# Altium PCB Quad FC V10.1.PcbDoc
Units mil, origin at the board's own origin, x right, y up, seen from the top; angles counter-clockwise.
Board outline 1968.5 x 1968.5 mil, 2 copper layers (Top Layer, Bottom Layer); 70 components, 50 nets, 311 pads, 42 vias.
Unrouted connection lines stored in the file: 2.
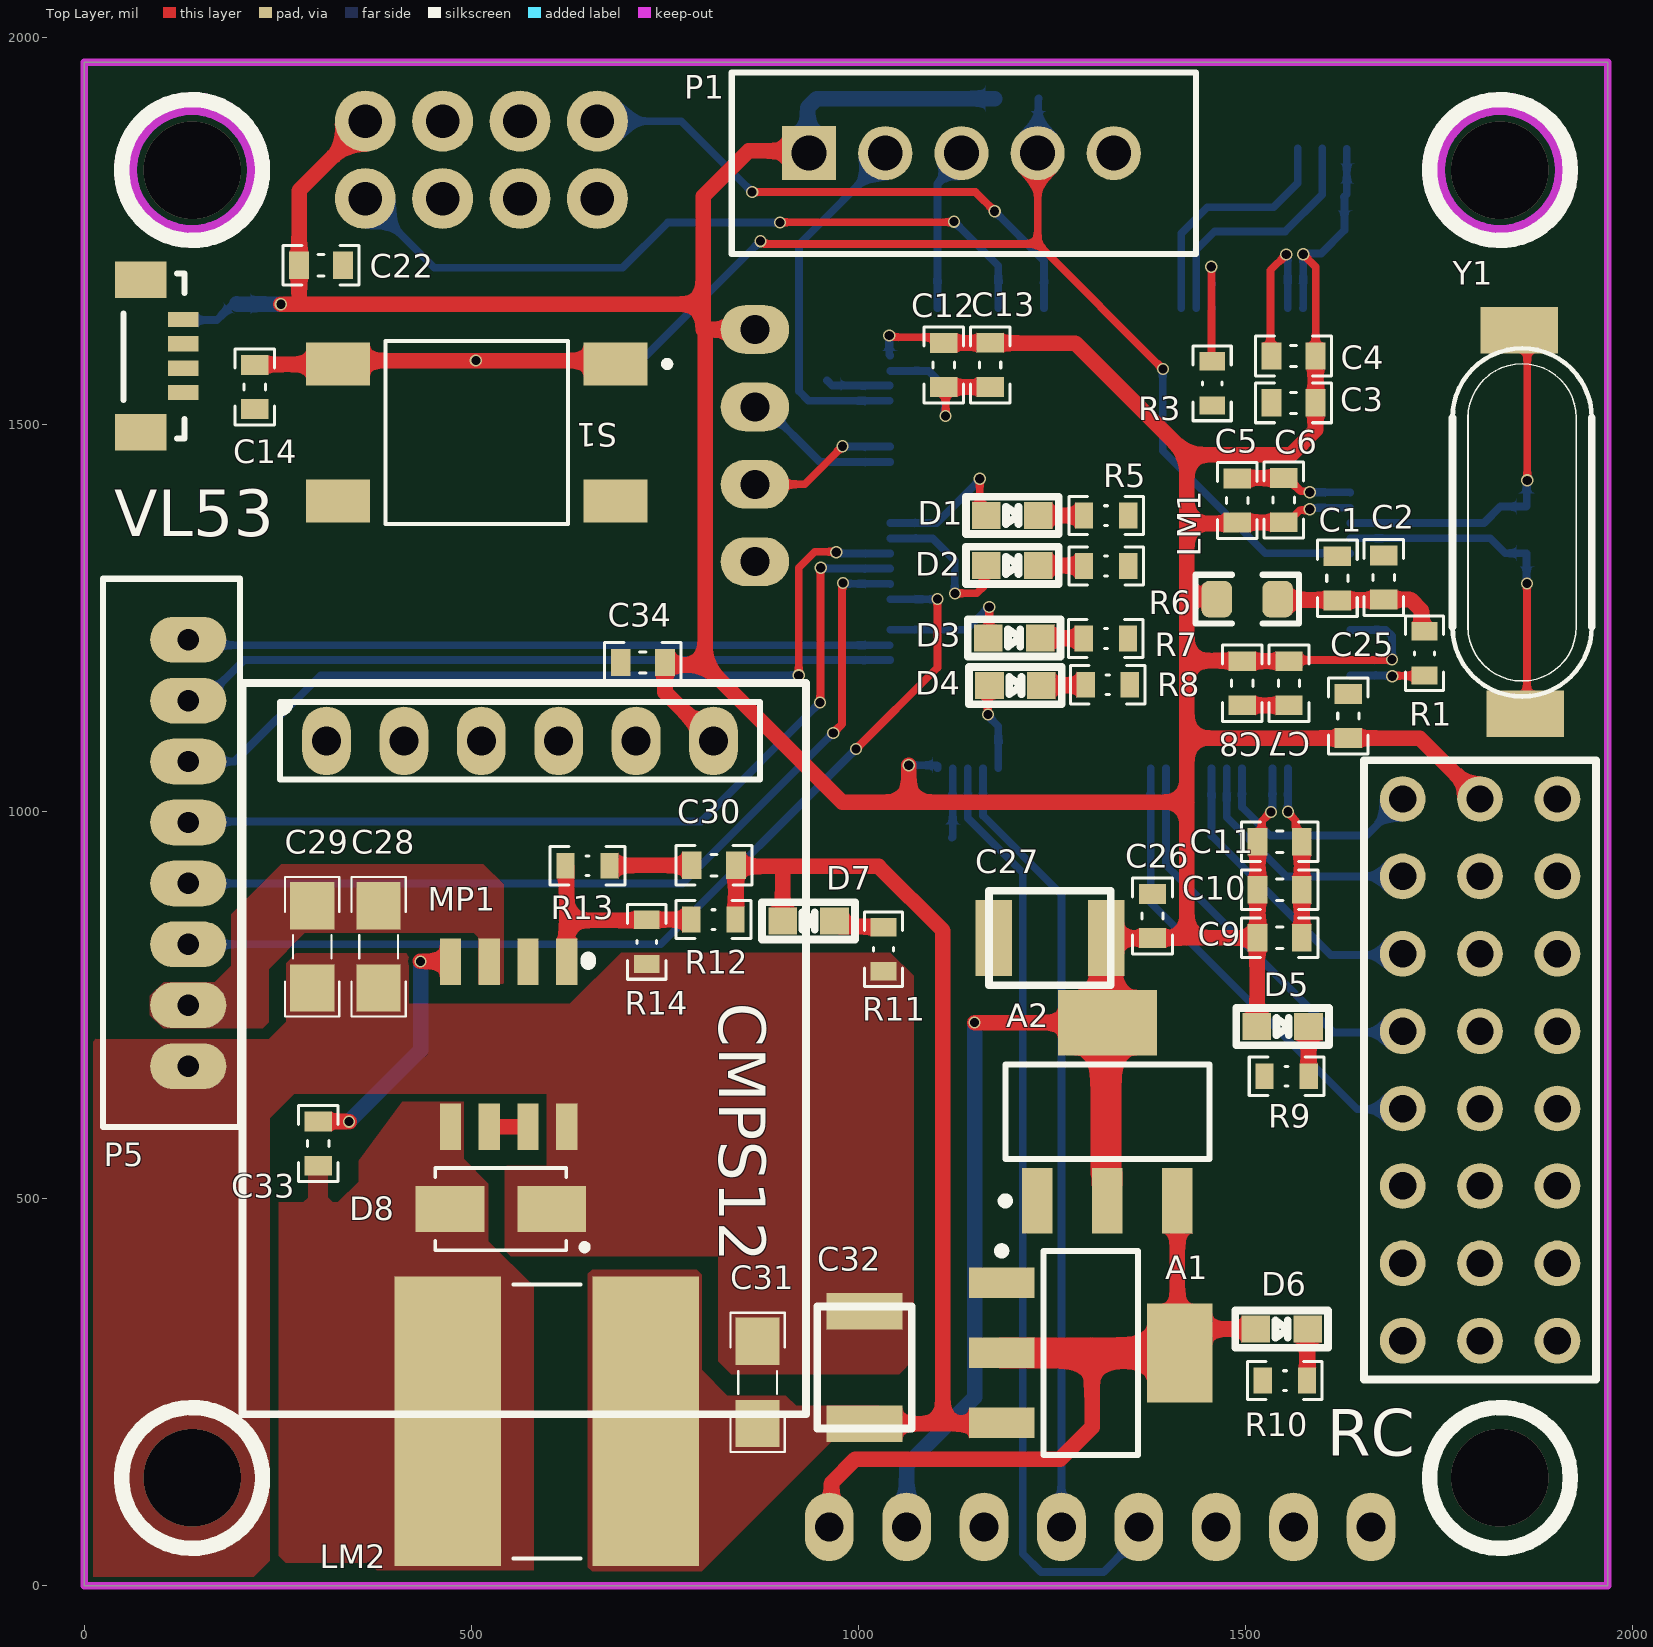
[diagram p0: Top Layer view]
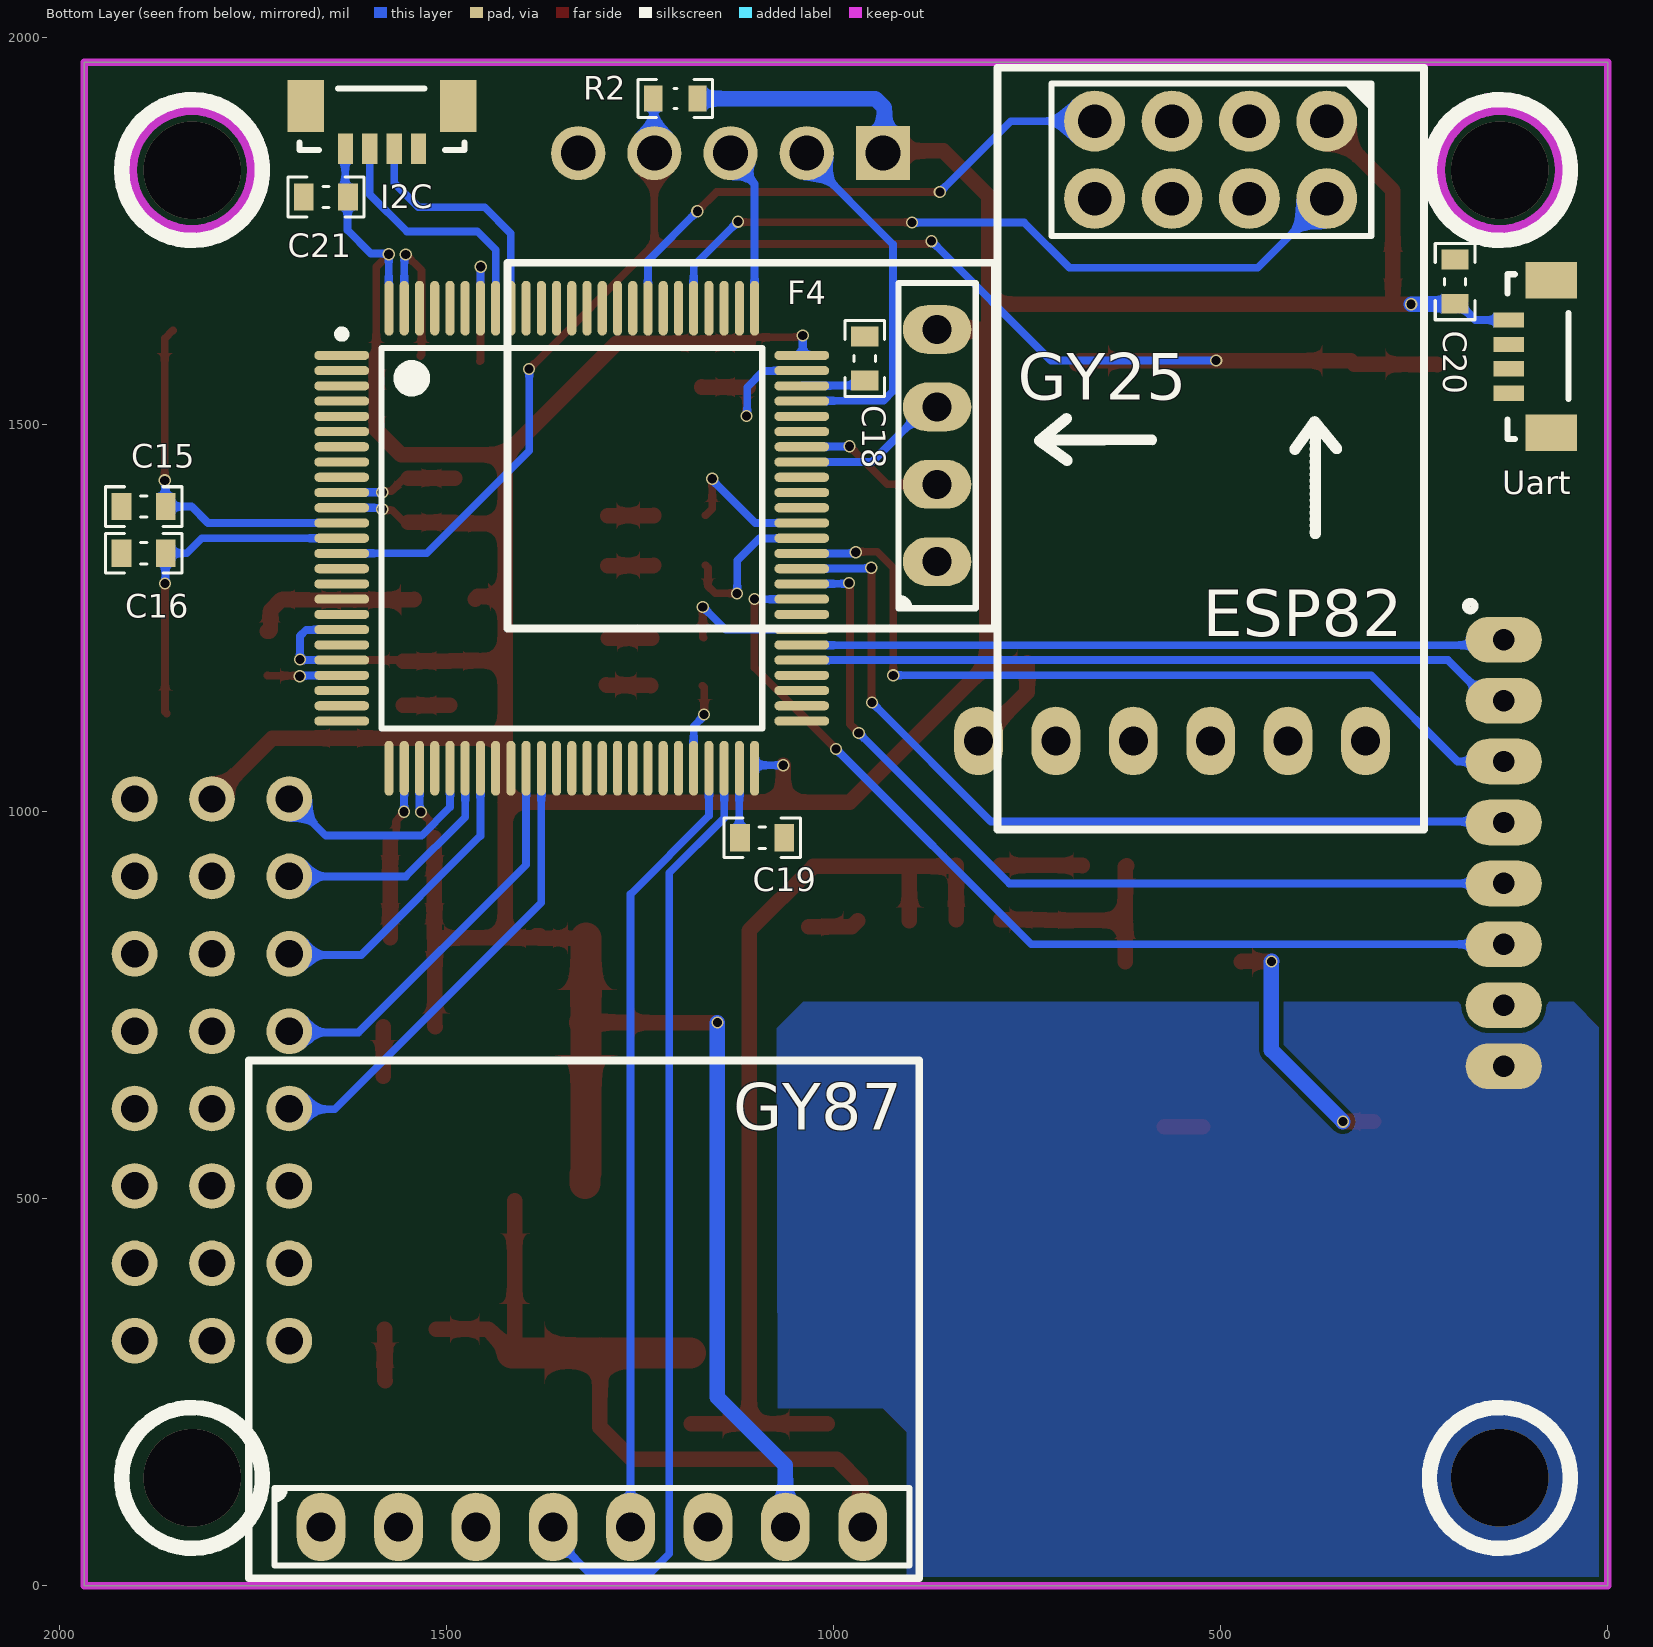
[diagram p1: Bottom Layer view, seen from below]
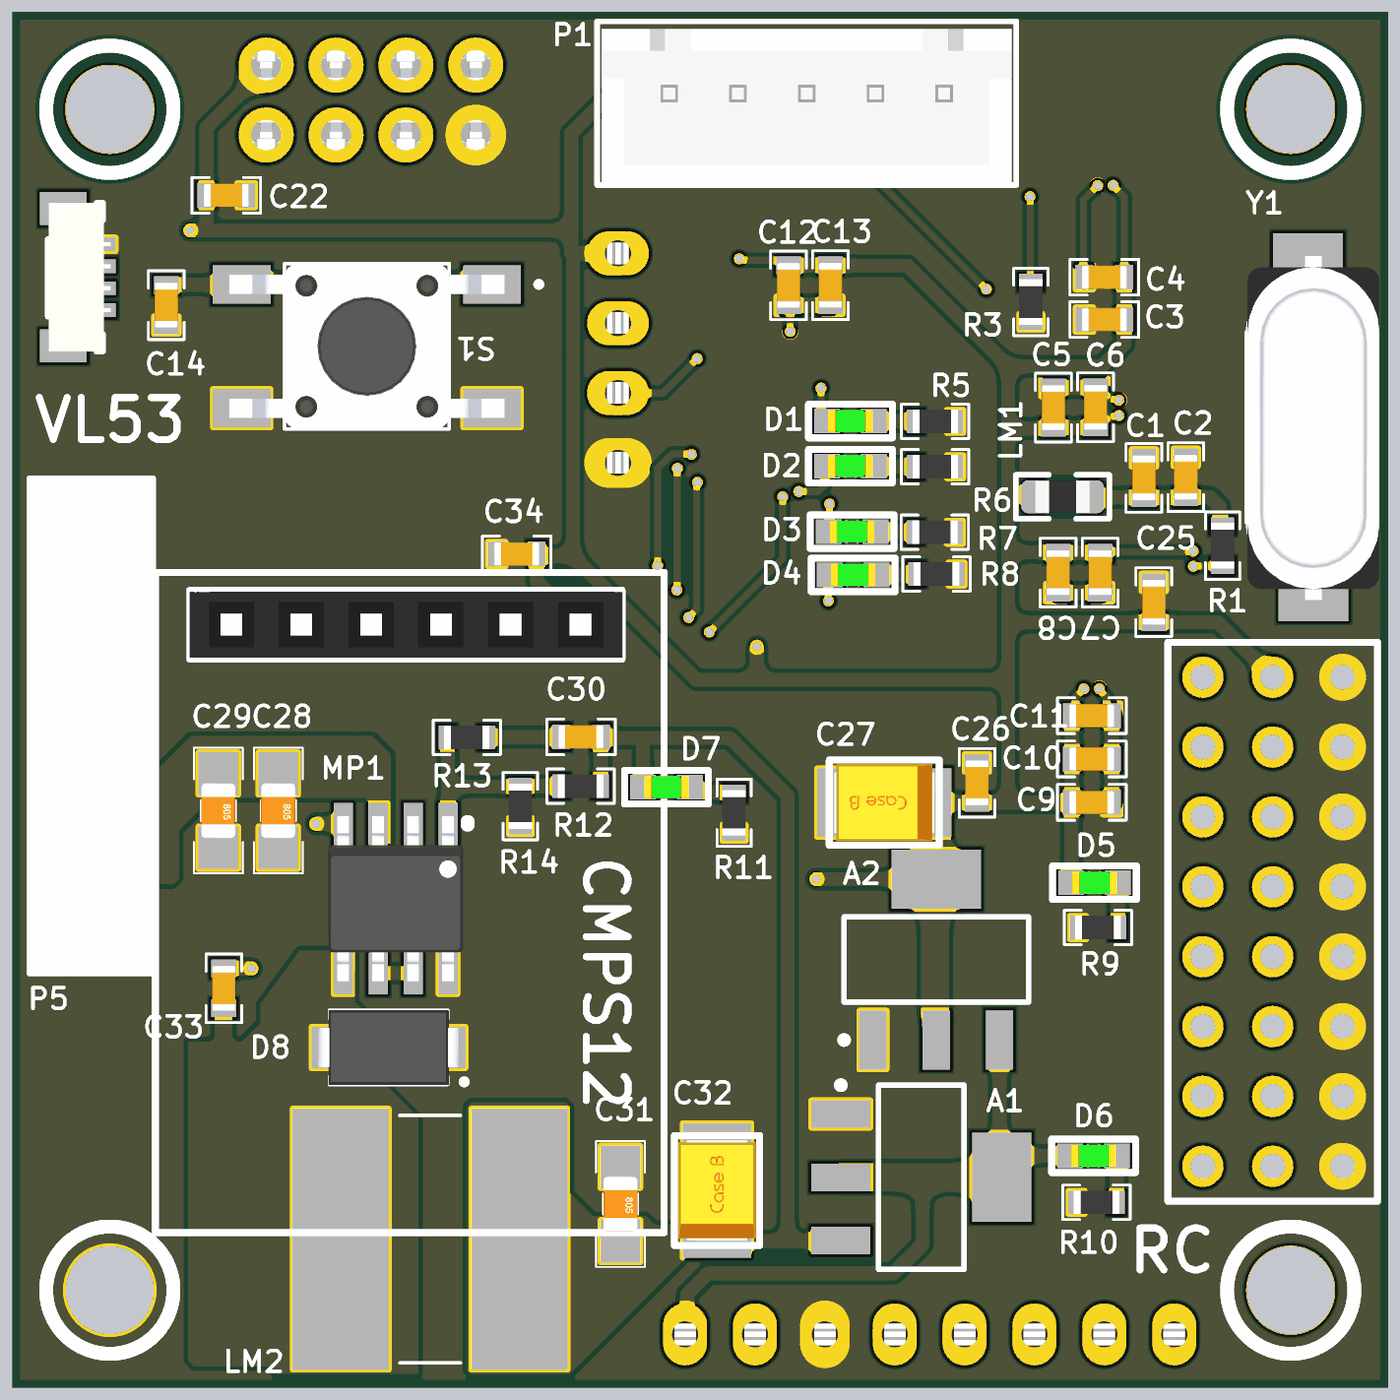
[diagram p2: 3D render of the assembled board from above, using the file's embedded part models]
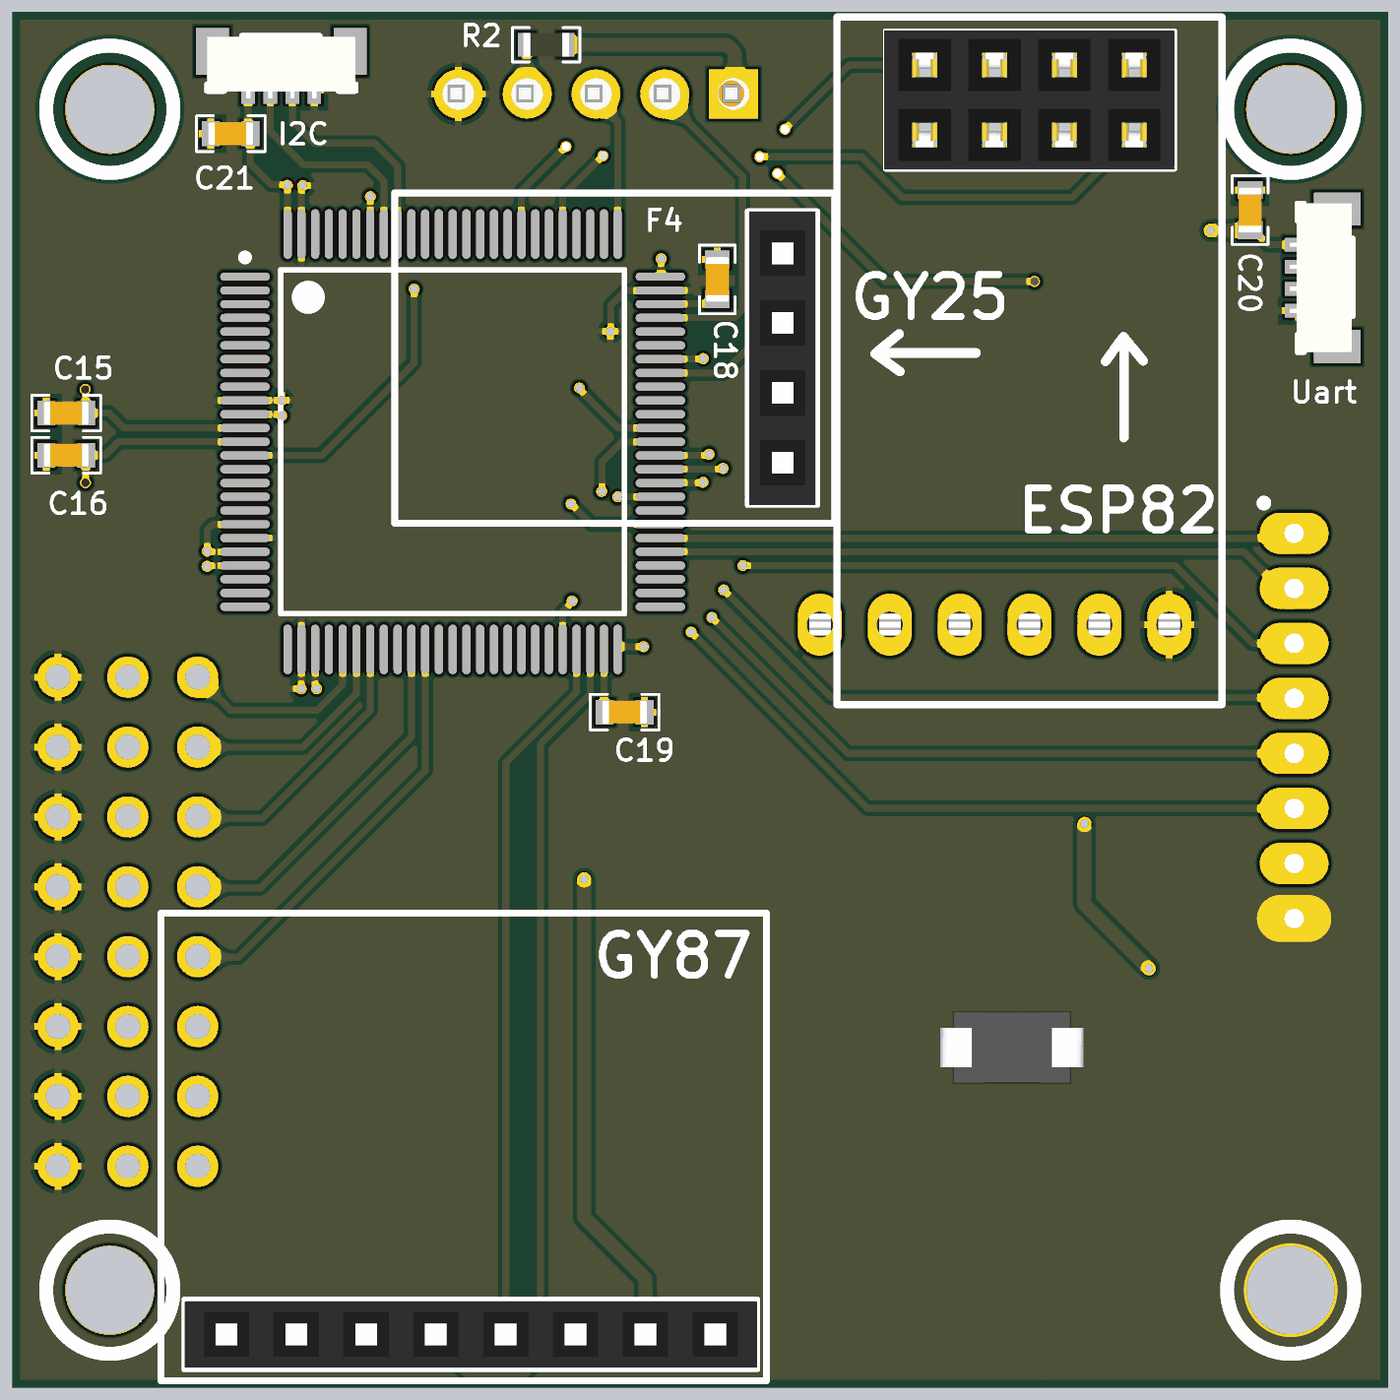
[diagram p3: 3D render of the assembled board from below, using the file's embedded part models]

## Layer stack, top to bottom
Top Solder: solder mask 0.4, Solder Resist, Dk 3.5
Top Layer: signal copper 1.4
Dielectric 1: dielectric 12.6, FR-4, Dk 4.8
Bottom Layer: signal copper 1.4
Bottom Solder: solder mask 0.4, Solder Resist, Dk 3.5

## Board outline
0,0 1968.5,0 1968.5,1968.5 0,1968.5

## Design rules (kind name [scope] priority, off if disabled: settings)
Clearance [All] p1: gap=6 ignorepadtopadclearanceinfootprint=FALSE except(0: Arc-Hole Track-Hole SMDPad-Hole THPad-Hole Via-Hole Fill-Hole Poly-Hole Region-Hole Text-Hole)
HoleSize [All] p1: absolutevalues=TRUE maxlimit=393.7 minlimit=1 maxpercent=80.000 minpercent=20.000
PlaneConnect PlaneConnect_2 [All] p1: planeconnectstyle=Direct reliefexpansion=20 reliefentries=4 reliefconductorwidth=10 reliefairgap=10
PlaneConnect PlaneConnect_1 [All] p2: planeconnectstyle=Relief reliefexpansion=20 reliefentries=4 reliefconductorwidth=10 reliefairgap=10
PlaneConnect [All] p3: planeconnectstyle=Relief reliefexpansion=20 reliefentries=4 reliefconductorwidth=10 reliefairgap=10
PolygonConnect PolygonConnect_20 [All vs IsNamedPolygon('NONET_L01_P003')] p1: connectstyle=Direct reliefconductorwidth=10 reliefentries=4 polygonreliefangle="90 Angle" airgapwidth=10
PolygonConnect PolygonConnect_19 [All vs IsNamedPolygon('NONET_L01_P003')] p2: connectstyle=Direct reliefconductorwidth=10 reliefentries=4 polygonreliefangle="90 Angle" airgapwidth=10
PolygonConnect PolygonConnect_18 [All vs IsNamedPolygon('NONET_L01_P002')] p3: connectstyle=Direct reliefconductorwidth=10 reliefentries=4 polygonreliefangle="90 Angle" airgapwidth=10
PolygonConnect PolygonConnect_17 [All vs IsNamedPolygon('NONET_L01_P001')] p4: connectstyle=Direct reliefconductorwidth=10 reliefentries=4 polygonreliefangle="90 Angle" airgapwidth=10
PolygonConnect PolygonConnect_16 [All vs IsNamedPolygon('NETC37_1_L01_P000')] p5: connectstyle=Direct reliefconductorwidth=10 reliefentries=4 polygonreliefangle="90 Angle" airgapwidth=10
PolygonConnect PolygonConnect_15 [All vs IsNamedPolygon('GND_L02_P008')] p6: connectstyle=Direct reliefconductorwidth=10 reliefentries=4 polygonreliefangle="90 Angle" airgapwidth=10
PolygonConnect PolygonConnect_14 [All vs IsNamedPolygon('GND_L01_P007')] p7: connectstyle=Direct reliefconductorwidth=10 reliefentries=4 polygonreliefangle="90 Angle" airgapwidth=10
PolygonConnect PolygonConnect_13 [All vs IsNamedPolygon('GND_L02_P001') Or IsNamedPolygon('NONET_L02_P004')] p8: connectstyle=Direct reliefconductorwidth=10 reliefentries=4 polygonreliefangle="90 Angle" airgapwidth=10
PolygonConnect PolygonConnect_12 [All vs IsNamedPolygon('GND_L01_P006')] p9: connectstyle=Direct reliefconductorwidth=10 reliefentries=4 polygonreliefangle="90 Angle" airgapwidth=10
PolygonConnect PolygonConnect_11 [All vs IsNamedPolygon('NONET_L01_P005')] p10: connectstyle=Direct reliefconductorwidth=10 reliefentries=4 polygonreliefangle="90 Angle" airgapwidth=10
PolygonConnect PolygonConnect_10 [All vs IsNamedPolygon('NETC37_1_L01_P002')] p11: connectstyle=Direct reliefconductorwidth=10 reliefentries=4 polygonreliefangle="90 Angle" airgapwidth=10
PolygonConnect PolygonConnect_9 [All vs IsNamedPolygon('MP1584-FB_L01_P005')] p12: connectstyle=Direct reliefconductorwidth=10 reliefentries=4 polygonreliefangle="90 Angle" airgapwidth=10
PolygonConnect PolygonConnect_8 [All vs IsNamedPolygon('GND_L02_P001')] p13: connectstyle=Direct reliefconductorwidth=10 reliefentries=4 polygonreliefangle="90 Angle" airgapwidth=10
PolygonConnect PolygonConnect_7 [All vs IsNamedPolygon('MP1584-FB_L01_P005')] p14: connectstyle=Direct reliefconductorwidth=10 reliefentries=4 polygonreliefangle="90 Angle" airgapwidth=10
PolygonConnect PolygonConnect_6 [All vs IsNamedPolygon('MP1584-FB_L01_P005')] p15: connectstyle=Direct reliefconductorwidth=10 reliefentries=4 polygonreliefangle="90 Angle" airgapwidth=10
PolygonConnect PolygonConnect_5 [All vs IsNamedPolygon('NONET_L02_P004')] p16: connectstyle=Direct reliefconductorwidth=10 reliefentries=4 polygonreliefangle="90 Angle" airgapwidth=10
PolygonConnect PolygonConnect_4 [All vs IsNamedPolygon('NETC34_1_L01_P003')] p17: connectstyle=Direct reliefconductorwidth=10 reliefentries=4 polygonreliefangle="90 Angle" airgapwidth=10
PolygonConnect PolygonConnect_3 [All vs IsNamedPolygon('NETC34_2_L01_P002')] p18: connectstyle=Direct reliefconductorwidth=10 reliefentries=4 polygonreliefangle="90 Angle" airgapwidth=10
PolygonConnect PolygonConnect_2 [All vs IsNamedPolygon('GND_L02_P001')] p19: connectstyle=Direct reliefconductorwidth=10 reliefentries=4 polygonreliefangle="90 Angle" airgapwidth=10
PolygonConnect PolygonConnect_1 [All vs IsNamedPolygon('VBAT+_L01_P000')] p20: connectstyle=Direct reliefconductorwidth=10 reliefentries=4 polygonreliefangle="90 Angle" airgapwidth=10
PolygonConnect [All] p21: connectstyle=Relief reliefconductorwidth=10 reliefentries=4 polygonreliefangle="90 Angle" airgapwidth=10
RoutingVias [All] p1: holewidth=11.81 width=15.75 viastyle="Through Hole" minholewidth=10 minwidth=10 maxholewidth=196.85 maxwidth=196.85
SilkToSilkClearance [All] p1: silktosilkclearance=6
SolderMaskExpansion [All] p1: expansion=4 istentingtop=FALSE
Width [All] p1: maxlimit=60 minlimit=6 preferedwidth=20
27 further rules are at their usual default settings.

## Classes and differential pairs
component class "Quad FC power V10.1": A1 A2 C26 C27 C28 C29 C30 C31 C32 C33 D5 D6 D7 D8 LM2 MP1 P5 R9 R10 R11 R12 R13 R14
component class "Quad FC V10.1": C1 C2 C3 C4 C5 C6 C7 C8 C9 C10 C11 C12 C13 C14 C15 C16 C18 C19 C20 C21 C22 C25 C34 CMPS12 D1 D2 D3 D4 ESP82 F4 GY25 GY87 I2C LM1 P1 R1 R2 R3 R5 R6 R7 R8 RC S1 Uart VL53 Y1

## Components (designator, comment, footprint, x,y, rotation, side; value= is the part's Value field where it differs from the comment)
A1 "3v3 regulator" SOT230P700X180-4N 1300.59,300.79 r0 top
A2 "5V regulator" SOT230P700X180-4N 1322.05,612.4 r90 top
C1 "100nF" CAP0603 1619.29,1301.77 r270 top
C2 "1uF" CAP0603 1679.13,1302.76 r270 top
C3 "100nF" CAP0603 1562.6,1528.35 r0 top
C4 "100nF" CAP0603 1562.6,1588.98 r0 top
C5 "100nF" CAP0603 1489.76,1402.36 r270 top
C6 "100nF" CAP0603 1550,1402.76 r270 top
C7 "100nF" CAP0603 1556.69,1166.14 r270 top
C8 "1uF" CAP0603 1496.46,1166.14 r270 top
C9 "100nF" CAP0603 1544.68,837.4 r180 top
C10 "4.7uF" CAP0603 1544.68,899.41 r180 top
C11 "100nF" CAP0603 1544.68,961.42 r180 top
C12 "100nF" CAP0603 1110.63,1577.36 r90 top
C13 "100nF" CAP0603 1170.47,1577.56 r90 top
C14 "100nF" CAP0603 220.08,1549.02 r270 top
C15 "10pF" CAP0603 1891.73,1394.49 r180 bottom
C16 "10pF" CAP0603 1891.73,1334.25 r0 bottom
C18 "2.2uF" CAP0603 959.84,1585.83 r90 bottom
C19 "2.2uF" CAP0603 1092.52,966.54 r180 bottom
C20 "100nF" CAP0603 197.24,1685.04 r90 bottom
C21 "100nF" CAP0603 1656.3,1794.49 r0 bottom
C22 "100nF" CAP0603 305.91,1706.3 r0 top
C25 "100nF" CAP0603 1633.47,1123.82 r90 top
C26 "100nF" CAP0603 1380.32,865.35 r270 top
C27 "10uF" MY_CAP_SMD-B 1247.64,837.01 r180 top value=3300u
C28 "2.2uF" CAPC3413X12N 380.32,825.59 r270 top
C29 "2.2uF" CAPC3413X12N 294.49,825.59 r270 top
C30 "100nF" CAP0603 813.58,931.1 r0 top
C31 "10uF" CAPC3413X12N 870.08,262.6 r270 top
C32 "100uF" MY_CAP_SMD-B 1008.27,281.89 r90 top value=3300u
C33 "100nF" CAP0603 302.36,571.26 r90 top
C34 "100nF" CAP0603 721.65,1192.91 r180 top
CMPS12 "CMPS12" "SAMTEC SSW-106-03-T-S" 562.99,1091.73 r0 top
D1 "LED" "0603 - LED" 1199.21,1383.07 r0 top
D2 "LED" "0603 - LED" 1199.21,1318.5 r0 top
D3 "LED" "0603 - LED" 1201.58,1224.8 r0 top
D4 "LED" "0603 - LED" 1203.12,1162.99 r0 top
D5 "LED" "0603 - LED" 1548.46,722.44 r0 top
D6 "LED" "0603 - LED" 1547.24,331.5 r0 top
D7 "LED" "0603 - LED" 935.83,859.06 r0 top
D8 "SS34" DIOM4226X244N 538.19,486.61 r180 top
ESP82 "ESP82" "HARWIN M20-7830445" 512.99,1842.52 r270 bottom
F4 "STM32F407VGT6" STM-LQFP100_N 1338.58,1353.54 r180 bottom locked
GY25 "GY25" "SAMTEC SSW-104-03-T-S" 866.54,1473.23 r90 bottom
GY87 "GY87" "SAMTEC SSW-108-03-T-S" 1312.6,75.98 r180 bottom
I2C "I2C" "JST BM04B-SURS-TF" 1583.86,1884.65 r180 bottom
LM1 "10uH" 0805L 1502.76,1274.8 r180 top value=FB805
LM2 "47uH" IND_RLS-105 597.64,212.2 r0 top
MP1 "MP9486AGN-Z" SOIC127P600X170-9N 548.23,699.53 r270 top
P1 "Programming connector" Connector1X5 936.61,1851.18 r0 top locked
P5 "Connector 8" "JST B8B-PH-K" 134.25,946.85 r270 top
R1 "0" RES0603 1731.89,1204.72 r270 top
R2 "1K" RES0603 1204.73,1921.65 r0 bottom
R3 "1K" RES0603 1457.48,1553.54 r270 top
R5 "1K" RES0603 1320.47,1382.68 r0 top
R6 "1K" RES0603 1320.47,1317.72 r0 top
R7 "1K" RES0603 1320.08,1224.02 r0 top
R8 "1K" RES0603 1322.44,1164.17 r0 top
R9 "1K" RES0603 1553.54,658.27 r180 top
R10 "1K" RES0603 1551.38,264.96 r180 top
R11 "1K" RES0603 1032.68,822.44 r270 top
R12 "590k" RES0603 812.99,860.63 r0 top value=1K
R13 "10k" RES0603 650.2,930.31 r180 top value=1K
R14 "10k" RES0603 726.77,831.89 r90 top value=1K
RC "Radio Control" HEADER8X3 1703.54,1016.53 r270 top
S1 "" SW_TL3301FF160QG 507.09,1490.16 r180 top
Uart "Uart" "JST BM04B-SURS-TF" 100.39,1588.19 r270 bottom
VL53 "VL53" "JST BM04B-SURS-TF" 100.39,1588.98 r90 top
Y1 "CRYSTAL_SMD" "My_Crystal - SMD" 1858,1374.02 r90 top locked

## Footprints (in the part's own frame and the unit in brackets; to place one, negate y for a bottom-side part, rotate by r counter-clockwise, add the part's x,y. Pads: shape width x height; smd on the part's side, far side on the other; paste and mask are expansions set on the pad)
"0603 - LED" [mil]
  rect 37x35 smd: 1(-33.5,0) 2(33.5,0)
  silkscreen extent -60,-24 60,24, body extent -32,-16 32,16, height 43
0805L [mm] ",0805, 2012, 200X130"
  rrect50% 1x1.2 smd mask+0.075: 1(-1,0) 2(1,0)
  Top Layer pour cut-out: -0.5,0.8 0.5,0.8 0.5,-0.8 -0.5,-0.8
  silkscreen extent -1.7,-0.8 1.7,0.8, body extent -1,-0.6 1,0.6, height 0.95
CAP0603 [mm] "Chip Capacitor, 2-Leads, Body 1/60x0/80mm, IPC Medium Density DESIGNER:ABBAS BASEREH"
  rect 0.65x0.9 smd: 1(-0.725,0) 2(0.725,0)
  silkscreen extent -1.25,-0.65 1.25,0.65, body extent -0.82,-0.43 0.82,0.43, height 0.4
CAPC3413X12N [mm] "Chip Capacitor, 2-Leads, Body 3/40x1/30mm, IPC Medium Density-Design:Abbas Basereh"
  rect 1.55x1.45 smd: 1(-1.35,0) 2(1.35,0)
  silkscreen extent -2.29,-0.89 2.29,0.89, body extent -1,-0.62 1,0.63, height 0.78
Connector1X5 [mil] "Connector; Header; 5 Position"
  rect 70x70 hole 45: 1(0,0)
  round 70 hole 45: 2(98.43,0) 3(196.85,0) 4(295.28,0) 5(393.7,0)
  silkscreen extent -100,-130 500,104, body extent -93,-133 493,93, height 276
DIOM4226X244N [mm]
  rect 2.26x1.51 smd: 1(-1.67,0) 2(1.67,0)
  silkscreen extent -2.85,-1.35 2.15,1.35, body extent -2.6,-1.36 2.6,1.36, height 1.19
"HARWIN M20-7830445" [mm] "2.54mm DIL PC TAIL PIN HEADER ASSEMBLY"
  round 2 hole 1.1: 1(-1.27,3.81) 2(-1.27,1.27) 3(-1.27,-1.27) 4(-1.27,-3.81) 5(1.27,-3.81) 6(1.27,-1.27) 7(1.27,1.27) 8(1.27,3.81)
  silkscreen extent -2.5,-5.23 2.5,5.27, body extent -2.52,-5.28 2.52,5.28, height 8.5
HEADER8X3 [mm]
  round 1.5 hole 0.9: 1(0,0) 2(2.54,0) 3(5.08,0) 4(7.62,0) 5(10.16,0) 6(12.7,0) 7(15.24,0) 8(17.78,0) 9(0,2.54) 10(2.54,2.54) 11(5.08,2.54) 12(7.62,2.54) 13(10.16,2.54) 14(12.7,2.54) 15(15.24,2.54) 16(17.78,2.54) 17(0,5.08) 18(2.54,5.08) 19(5.08,5.08) 20(7.62,5.08) 21(10.16,5.08) 22(12.7,5.08) 23(15.24,5.08) 24(17.78,5.08)
  silkscreen extent -1.27,-1.27 19.05,6.35
IND_RLS-105 [mm]
  rect 3.5x9.5 smd: 1(-3.25,0) 2(3.25,0)
  silkscreen extent -1.1,-4.5 1.1,4.5
"JST B8B-PH-K" [mm]
  oval 1.5x2.5 hole 0.7: 1(-7,0) 2(-5,0) 3(-3,0) 4(-1,0) 5(1,0) 6(3,0) 7(5,0) 8(7,0)
  silkscreen extent -9,-2.8 9,1.7, body extent -8.95,-2.8 8.95,1.7, height 6
"JST BM04B-SURS-TF" [mm] "1.0mm pitch/Disconnectable Crimp style connector"
  rect 0.5x1 smd: 1(-1.2,-0.7) 2(-0.4,-0.7) 3(0.4,-0.7) 4(1.2,-0.7)
  rect 1.2x1.7 smd: M(-2.5,0.7) M(2.5,0.7)
  silkscreen extent -2.7,-0.74 2.71,1.27, body extent -2.7,-1.02 2.7,1.23, height 2.75
MY_CAP_SMD-B [mm] "3.1X4"
  rect 1.2x2.5 smd: +(-1.845,0) -(1.845,0)
  silkscreen extent -2,-1.55 2,1.55, body extent -1.85,-1.41 1.85,1.41, height 2.14
"My_Crystal - SMD" [mil]
  rect 60x100 smd: 1(-247.06,-3.93) 2(248.03,3.94)
  silkscreen extent -225,-90 225,90, body extent -247,-98 245,91, height 154
RES0603 [mm] "Chip Resistor, 2-Leads, Body 1/60x0/80mm, IPC Medium Density DESIGNER:ABBAS BASEREH"
  rect 0.6x0.85 smd: 1(-0.725,0) 2(0.725,0)
  silkscreen extent -1.23,-0.63 1.23,0.62, body extent -0.82,-0.43 0.82,0.43, height 0.4
"SAMTEC SSW-104-03-T-S" [mm]
  oval 1.6x2.25 hole 0.95: 1(-3.81,0) 2(-1.27,0) 3(1.27,0) 4(3.81,0)
  silkscreen extent -5.34,-1.27 5.34,1.27, body extent -5.33,-1.21 5.33,1.21, height 8.51
"SAMTEC SSW-106-03-T-S" [mm]
  oval 1.6x2.25 hole 0.95: 1(-6.35,0) 2(-3.81,0) 3(-1.27,0) 4(1.27,0) 5(3.81,0) 6(6.35,0)
  silkscreen extent -7.88,-1.27 7.88,1.27, body extent -7.87,-1.21 7.87,1.21, height 8.51
"SAMTEC SSW-108-03-T-S" [mm]
  oval 1.6x2.25 hole 0.95: 1(-8.89,0) 2(-6.35,0) 3(-3.81,0) 4(-1.27,0) 5(1.27,0) 6(3.81,0) 7(6.35,0) 8(8.89,0)
  silkscreen extent -10.42,-1.27 10.42,1.27, body extent -10.41,-1.21 10.41,1.21, height 8.51
SOIC127P600X170-9N [mm]
  rect 1.525x0.7 smd: 1(-2.712,1.905) 2(-2.712,0.635) 3(-2.712,-0.635) 4(-2.712,-1.905) 5(2.712,-1.905) 6(2.712,-0.635) 7(2.712,0.635) 8(2.712,1.905)
  silkscreen extent -2.79,2.62 -2.69,2.62, body extent -3,-2.45 3,2.45, height 1.7
SOT230P700X180-4N [mm] "SOT223, 4-Leads, Body 6.50x7.00mm (avg), Pitch 2.30mm, IPC Medium Density"
  rect 2.15x1 smd: 1(-2.925,2.3) 2(-2.925,0) 3(-2.925,-2.3)
  rect 2.15x3.25 smd: 4(2.925,0)
  silkscreen extent -3.05,-3.35 1.55,3.47, body extent -1.85,-3.35 1.85,3.35, height 1.8
STM-LQFP100_N [mm] "Thin QFP, 100-Leads, Body 14x14mm, Pitch 0.5mm, IPC Medium Density"
  oval 1.8x0.3 smd: 1(-7.55,6) 2(-7.55,5.5) 3(-7.55,5) 4(-7.55,4.5) 5(-7.55,4) 6(-7.55,3.5) 7(-7.55,3) 8(-7.55,2.5) 9(-7.55,2) 10(-7.55,1.5) 11(-7.55,1) 12(-7.55,0.5) 13(-7.55,0) 14(-7.55,-0.5) 15(-7.55,-1) 16(-7.55,-1.5) 17(-7.55,-2) 18(-7.55,-2.5) 19(-7.55,-3) 20(-7.55,-3.5) 21(-7.55,-4) 22(-7.55,-4.5) 23(-7.55,-5) 24(-7.55,-5.5) 25(-7.55,-6) 51(7.55,-6) 52(7.55,-5.5) 53(7.55,-5) 54(7.55,-4.5) 55(7.55,-4) 56(7.55,-3.5) 57(7.55,-3) 58(7.55,-2.5) 59(7.55,-2) 60(7.55,-1.5) 61(7.55,-1) 62(7.55,-0.5) 63(7.55,0) 64(7.55,0.5) 65(7.55,1) 66(7.55,1.5) 67(7.55,2) 68(7.55,2.5) 69(7.55,3) 70(7.55,3.5) 71(7.55,4) 72(7.55,4.5) 73(7.55,5) 74(7.55,5.5) 75(7.55,6)
  oval 0.3x1.8 smd: 26(-6,-7.55) 27(-5.5,-7.55) 28(-5,-7.55) 29(-4.5,-7.55) 30(-4,-7.55) 31(-3.5,-7.55) 32(-3,-7.55) 33(-2.5,-7.55) 34(-2,-7.55) 35(-1.5,-7.55) 36(-1,-7.55) 37(-0.5,-7.55) 38(0,-7.55) 39(0.5,-7.55) 40(1,-7.55) 41(1.5,-7.55) 42(2,-7.55) 43(2.5,-7.55) 44(3,-7.55) 45(3.5,-7.55) 46(4,-7.55) 47(4.5,-7.55) 48(5,-7.55) 49(5.5,-7.55) 50(6,-7.55) 76(6,7.55) 77(5.5,7.55) 78(5,7.55) 79(4.5,7.55) 80(4,7.55) 81(3.5,7.55) 82(3,7.55) 83(2.5,7.55) 84(2,7.55) 85(1.5,7.55) 86(1,7.55) 87(0.5,7.55) 88(0,7.55) 89(-0.5,7.55) 90(-1,7.55) 91(-1.5,7.55) 92(-2,7.55) 93(-2.5,7.55) 94(-3,7.55) 95(-3.5,7.55) 96(-4,7.55) 97(-4.5,7.55) 98(-5,7.55) 99(-5.5,7.55) 100(-6,7.55)
  silkscreen extent -7.68,-6.25 6.25,6.82, body extent -7,-7 7,7, height 1.6
SW_TL3301FF160QG [mm]
  rect 2.1x1.4 smd: 1(-4.55,-2.25) 2(4.55,-2.25) 3(-4.55,2.25) 4(4.55,2.25)
  silkscreen extent -6.35,-3 3,3, body extent -5,-3 5,3, height 7.1

## Part data
A1 A2: library part ams1117
C1 C2 C3 C4 C5 C6 C7 C8 C9 C10 C11 C12 C13 C14 C15 C16 C18 C19 C20 C21 C22 C25 C26 C30 C33 C34: library part "CAP SMD PACKAGE", "F407VET6 Power CAP", Data=2017-3-10, Desc.="CAP SMD TOTAL PACKAGES", Designer="Abbas Basereh"
C27 C32: library part CAP_TANTAL_B, "3.5X2.8MM"
C28 C29 C31: library part "CAP SMD 0805", "CAP 0805", Data=16-12-2016, Desc.="CAP SMD 0805", Designer="Abbas Basereh"
CMPS12: library part SSW-106-03-T-S, "CONN RCPT 6POS 0.1 TIN PCB", Current Rating (Amps)="5.7A per Contact", Insulation Color=Black, Manufacturer="Samtec Inc.", Material Flammability Rating="UL94 V-0", Operating Temperature="-55°C ~ 105°C", Supplier Part Number 1=SAM8865-ND, ComponentLink1Description=Datasheet, ComponentLink1URL=http://suddendocs.samtec.com/prints/ssw-s.pdf, ComponentLink2Description="DigiKey Link", ComponentLink2URL=https://www.digikey.com/en/products/detail/samtec-inc/SSW-106-03-T-S/1790202, Connector Type=Receptacle, Contact Finish - Mating=Tin, Contact Finish - Post=Tin, Contact Length - Post="0.394\" (10.00mm)", Contact Type=Forked, Fastening Type=Push-Pull, Insulation Height="0.335\" (8.51mm)", LastUpdated="6/21/2022 3:09:22 PM", Lifecycle Status=Active, Minimum Order=1, Mounting Type="Through Hole", Number of Positions=6, Number of Positions Loaded=All, Number of Rows=1, Packaging=Bulk, Part Number=SSW-106-03-T-S, Part Status=Active, Pitch - Mating="0.100\" (2.54mm)", Price=0.55, Series=SSW, Style="Board to Board or Cable", Supplier 1=DigiKey, Termination=Solder
D1 D2 D3 D4 D5 D6 D7: "Led", LatestRevisionDate=08-Jul-2005, LatestRevisionNote="Mech Layer 1 removed.", PackageReference=LED-0, Published=8-Jun-2000, Publisher="Altium Limited"
D8: library part "1n5822 SMD", Manufacturer="ON Semiconductor/Fairchild", Data=16-12-2016, Designer="Abbas Basereh", Link=https://www.aliexpress.com/item/Free-shipping-100pcs-1n5822-sma-smd-do-214ac-Schottky-diode-ss34/32337482329.html?spm=2114.01010208.3.1.zLZDsP&ws_ab_test=searchweb0_0,searchweb201602_4_10065_10068_10084_10083_10080_10082_10081_10060_10061_10062_10056_10055_10054_10059_10099_10078_10079_427_10073_10103_10102_10096_10052_10050_10051,searchweb201603_4&btsid=6e50dc92-ac69-45bc-a19e-209af19ce602, Part. No=SS34
ESP82: library part M20-7830442, "CONN RCPT 8POS 0.1 GOLD PCB", Current Rating (Amps)=3A, Insulation Color=Black, Manufacturer="Harwin Inc.", Material Flammability Rating="UL94 V-0", Operating Temperature="-40°C ~ 105°C", Supplier Part Number 1=952-1789-ND, ComponentLink1Description=Datasheet, ComponentLink1URL=https://cdn.harwin.com/pdfs/C001XX_M20_Series_Connectors.pdf, ComponentLink2Description="DigiKey Link", ComponentLink2URL=http://digikey.com/product-detail/en/harwin-inc/M20-7830442/952-1789-ND/3727758, Connector Type=Receptacle, Contact Finish - Mating=Gold, Contact Finish - Post=Tin, Contact Finish Thickness - Mating=Flash, Contact Length - Post="0.118\" (3.00mm)", Contact Type="Female Socket", Fastening Type=Push-Pull, Insulation Height="0.335\" (8.51mm)", LastUpdated="9/21/2022 7:04:26 PM", Lifecycle Status=Active, Mated Stacking Heights="11.04mm, 12.63mm", Minimum Order=1, Mounting Type="Through Hole", Number of Positions=8, Number of Positions Loaded=All, Number of Rows=2, Packaging=Tube, Part Number=M20-7830442, Part Status=Active, Pitch - Mating="0.100\" (2.54mm)", Price=1.36, Row Spacing - Mating="0.100\" (2.54mm)", Series=M20, Style="Board to Board or Cable", Supplier 1=DigiKey, Termination=Solder
F4: "ARM Cortex-M4 32-bit MCU+FPU, 210 DMIPS, 1024 kB Flash, 192 kB Internal RAM, 82 I/Os, 100-pin LQFP, -40 to 85 degC, Tray", I/Os (High Current)=82, Manufacturer=STMicroelectronics, Operating Frequency(F) (Processor speed) (MHz)=168, Supplier Part Number 1=497-11605-ND, Supply Voltage(Vcc) max (V)=3.6, Supply Voltage(Vcc) min (V)=1.8, ComponentLink1Description="Manufacturer URL", ComponentLink1URL=http://www.st.com/web/en/home.html, ComponentLink2Description=Datasheet, ComponentLink2URL=http://www.st.com/st-web-ui/static/active/en/resource/technical/document/datasheet/DM00037051.pdf, ComponentLink3Description="Package Specification", ComponentLink3URL=http://www.st.com/st-web-ui/static/active/en/resource/technical/document/data_brief/DM00071938.pdf, Core="ARM Cortex-M4", D/A Converter=2x12-bit, DatasheetVersion="Rev. 4", FLASH Size (Prog) (kB)=1024, Internal RAM Size (kB)=192, Mounting Technology="Surface Mount", PackageDescription="100-Pin Low Profile Quad Flat Package, 14 x 14 mm Body, 0.5 mm Pitch", PackageReference=LQFP100, PackageVersion="Rev. 1, 06/2013", Packing=Tray, PartNumber=STM32F407VGT6, Supplier 1=Digi-Key, Supplier 2=Farnell, Supplier 3=Newark, Supplier 4=Mouser, Supplier Part Number 2=2064368, Supplier Part Number 3=73T2333, Supplier Part Number 4=511-STM32F407VGT6
GY25: library part SSW-104-03-T-S, "CONN RCPT 4POS 0.1 TIN PCB", Current Rating (Amps)="5.7A per Contact", Insulation Color=Black, Manufacturer="Samtec Inc.", Material Flammability Rating="UL94 V-0", Operating Temperature="-55°C ~ 105°C", Supplier Part Number 1=SSW-104-03-T-S-ND, ComponentLink2Description="DigiKey Link", ComponentLink2URL=http://digikey.com/product-detail/en/samtec-inc/SSW-104-03-T-S/SSW-104-03-T-S-ND/7874034, Connector Type=Receptacle, Contact Finish - Mating=Tin, Contact Finish - Post=Tin, Contact Type=Forked, Fastening Type=Push-Pull, LastUpdated="6/21/2022 3:08:52 PM", Lifecycle Status=Active, Minimum Order=1, Mounting Type="Through Hole", Number of Positions=4, Number of Positions Loaded=All, Number of Rows=1, Packaging=Bulk, Part Number=SSW-104-03-T-S, Part Status=Active, Price=0.83, Series=SSW, Style="Board to Board or Cable", Supplier 1=DigiKey, Termination=Solder
GY87: library part SSW-108-03-T-S, "CONN RCPT 8POS 0.1 TIN PCB", Current Rating (Amps)="5.7A per Contact", Insulation Color=Black, Manufacturer="Samtec Inc.", Material Flammability Rating="UL94 V-0", Operating Temperature="-55°C ~ 105°C", Supplier Part Number 1=SAM8866-ND, ComponentLink1Description=Datasheet, ComponentLink1URL=http://suddendocs.samtec.com/catalog_english/ssw_th.pdf, ComponentLink2Description="DigiKey Link", ComponentLink2URL=https://www.digikey.com/en/products/detail/samtec-inc/SSW-108-03-T-S/1790200, Connector Type=Receptacle, Contact Finish - Mating=Tin, Contact Finish - Post=Tin, Contact Length - Post="0.394\" (10.00mm)", Contact Type=Forked, Fastening Type=Push-Pull, Insulation Height="0.335\" (8.51mm)", LastUpdated="6/21/2022 3:09:52 PM", Lifecycle Status=Active, Minimum Order=1, Mounting Type="Through Hole", Number of Positions=8, Number of Positions Loaded=All, Number of Rows=1, Packaging=Bulk, Part Number=SSW-108-03-T-S, Part Status=Active, Pitch - Mating="0.100\" (2.54mm)", Price=0.73, Series=SSW, Style="Board to Board or Cable", Supplier 1=DigiKey, Termination=Solder
I2C Uart VL53: library part MHDR_1X04, "Male Header 1X04"
LM1 LM2: library part "L SMA 0.25W", "Inductor", Code_IEC=1005, Code_JEITA=0402, LatestRevisionDate=29-May-2009, LatestRevisionNote="IPC-7351 Footprint Added.", PackageDescription="Chip Inductor", PackageReference=0402-A, Published=8-Jun-2000, Publisher="Altium Limited"
MP1: "Buck Switching Regulator IC Positive Fixed 5V 1 Output 1A 8-SOIC (0.154, 3.90mm Width) Exposed Pad", Package="SOIC-8 Monolithic Power", Check_prices=https://www.snapeda.com/parts/MP9486AGN-Z/Monolithic+Power+Systems+Inc./view-part/?ref=eda, MF="Monolithic Power", MP=MP9486AGN-Z, SnapEDA_Link=https://www.snapeda.com/parts/MP9486AGN-Z/Monolithic+Power+Systems+Inc./view-part/?ref=snap
P1: library part Connector1x5, "Connector, 5-Pin2.5mm", LatestRevisionDate=17-Jul-2002, LatestRevisionNote="Re-released for DXP Platform.", Publisher="Altium Limited"
P5: library part Connector1x8, "Connector, 8-Pin2.5mm", LatestRevisionDate=17-Jul-2002, LatestRevisionNote="Re-released for DXP Platform.", Publisher="Altium Limited"
R1 R2 R3 R5 R6 R7 R8 R9 R10 R11: library part "RES SMD PACKAGE", "TOTAL SMD RESISTOR PACK", Data=2017-3-10, Desc.="RES SMD PAKAGES", Designer="Abbas Basereh"
R12 R13 R14: library part "RES SMD PACKAGE", "To Limit current", Data=2017-3-10, Desc.="RES SMD PAKAGES", Designer="Abbas Basereh"
RC: library part MHDR_2X12, "Male Header 2X12"
S1: library part TL3301FF160QG, "Tactile switch for manual RESET", Package=None, Availability="In Stock", Check_prices=https://www.snapeda.com/parts/TL3301FF160QG/E-Switch/view-part/?ref=eda, MF=E-Switch, MP=TL3301FF160QG, Price=None, Purchase-URL=https://pricing.snapeda.com/search/part/TL3301FF160QG/?ref=eda, SnapEDA_Link=https://www.snapeda.com/parts/TL3301FF160QG/E-Switch/view-part/?ref=snap
Y1: "Crystal"

## Via types
v1: diameter 15.75, hole 11.81, Top Layer to Bottom Layer, 38 vias
v2: diameter 125.98, hole 125.98, Top Layer to Bottom Layer, 4 vias

## Nets (pads, with @x,y where several pads share a name; then routed paths per layer and width w, separated by ;. In a path a pad name is that pad's centre, name@x,y a point inside that pad or via, vN(x,y) a via of type N, cw(c..) or ccw(c..) an arc to the next point about the centre after c; other vN are vias at no path point)
3V3: A2.2 A2.4 C3.2 C4.2 C5.2 C6.2 C7.1 C8.1 C9.2 C10.2 C11.2 C12.2 C13.2 C20.1 C21.1 C22.1 C25.1 C26.2 C27.+ C34.1 CMPS12.6 D5.1 ESP82.1 F4.11 F4.19 F4.21 F4.28 F4.50 F4.75 F4.100 GY25.4 GY87.7 I2C.1 LM1.2 P1.1 R2.1 RC.9 Uart.1 VL53.1 | length 7630.2
  Top Layer w10: v1(1040.16,1615.36) 1041.26,1614.26 1045.32,1614.26 1046.19,1613.39 1103.15,1613.39 C12.2 ; C11.2@1516.14,966.34 1521.38,971.58 1521.38,987.9 v1(1533.41,999.93) ; C6.2 1554.92,1374.21 1570.55,1389.85 1582.37,1389.85 v1(1583.47,1390.95) ; C7.1 1558.07,1196.06 1688.89,1196.06 v1(1689.76,1196.94) ; v1(1575.2,1720.47) 1575.2,1720.01 1591.14,1704.07 C4.2
  Top Layer w20: v1(253.94,1655.91) 277.95,1655.91 ; ESP82.1 362.99,1888.19 277.56,1802.76 277.56,1656.3 277.95,1655.91 ; C34.1 C34.1@750.2,1192.36 ; C34.1@750.79,1187.4 C34.1@752.99,1185.2 ; 802.17,1623.23 802.17,1189.57 ; CMPS12.6@804.77,1099.96 CMPS12.6 812.99,1092.89 793.13,1112.75 791.97,1112.75 750.2,1154.53 C34.1@750.2,1192.36 ; GY25.4 799.61,1623.23 799.61,1655.91 ; P1.1 933.86,1853.94 858.27,1853.94 799.61,1795.28 799.61,1655.91 ; v1(1065.35,1060.24) 1065.35,1012.6 ; C12.2 1110.73,1606 1170.37,1606 C13.2 ; v1(1150.39,727.56) A2.4 ; C13.2@1171.06,1605.51 1280.71,1605.51 1424.8,1461.42 ; C27.+ 1320.48,836.81 C26.2 1380.61,837.11 C26.2@1387.3,837.11 ; C26.2@1379.92,839.57 1384.84,839.57 C26.2@1387.3,837.11 ; LM1.2 1459.84,1278.35 1424.8,1278.35 ; C5.2@1488.39,1372.44 1424.8,1372.44 ; C5.2 1489.96,1374.02 1549.8,1374.02 C6.2 ; C8.1@1495.87,1195.28 1424.8,1195.28 ; C8.1 C7.1 ; D5.1 1515.55,723.03 1515.55,836.81 C9.2@1515.84,837.11 ; C11.2@1516.14,966.34 C11.2 C10.2 C9.2 C9.2@1515.84,837.11 ; C4.2 C3.2 1591.14,1493.5 1559.06,1461.42 1424.8,1461.42 ; RC.9@1803.54,1017.32 1725.59,1095.28 C25.1 1424.8,1095.28 ; 277.95,1655.91 799.61,1655.91 ; C34.1@750.2,1192.36 752.99,1189.57 802.17,1189.57 ; 802.17,1189.57 979.13,1012.6 1065.35,1012.6 ; 1065.35,1012.6 1424.8,1012.6 ; C26.2@1387.3,837.11 1424.8,837.11 ; 1424.8,837.11 1424.8,1012.6 ; 1424.8,837.11 C9.2@1515.84,837.11 ; 1424.8,1012.6 1424.8,1095.28 ; 1424.8,1095.28 1424.8,1195.28 ; 1424.8,1195.28 1424.8,1278.35 ; 1424.8,1278.35 1424.8,1372.44 ; 1424.8,1372.44 1424.8,1461.42
  Top Layer w40: A2.4@1320.08,725.59 1320.08,533.38 1321.73,531.73 A2.2@1321.73,519.57 ; C27.+ 1320.28,729.32 A2.4
  Bottom Layer w10: Uart.1 171.26,1635.43 192.32,1656.5 C20.1 ; v1(1040.16,1615.36) 1040.16,1590.6 1040.99,1589.77 F4.75 ; v1(1065.35,1060.24) 1101.53,1060.24 1102.36,1059.4 F4.50 ; v1(1533.41,999.93) 1533.41,1001.48 1535.43,1003.51 F4.28 ; F4.100 1575,1650.99 v1@1575,1719.88 ; v1(1575.2,1720.47) 1576.25,1721.53 1598.3,1721.53 1628.35,1751.58 C21.1@1628.35,1793.9 ; v1(1583.47,1390.95) 1585.02,1390.95 1586.99,1392.92 F4.11 ; C21.1 1631.5,1798.23 I2C.1@1631.5,1856.69 ; F4.21 1688.89,1196.06 v1(1689.76,1196.94) ; F4.19 1636.17,1235.09 1681.84,1235.09 1689.76,1227.17 1689.76,1195.67 v1@1689.57,1195.87
  Bottom Layer w20: C20.1 197.84,1655.91 v1(253.94,1655.91) ; GY25.4@864.07,1625.69 GY25.4 ; P1.1 934.65,1853.15 934.65,1909.84 946.46,1921.65 R2.1 ; GY87.7 1062.6,155.51 1150.39,243.31 v1(1150.39,727.56)
5V: A1.2 A1.4 A2.3 D6.1 GY87.8 | length 1058.8
  Top Layer w20: GY87.8@961.42,77.17 965.51,81.26 965.51,132.83 996.06,163.39 1261.02,163.39 1302.36,204.73 1302.36,300.79 ; A2.3 1412.6,303.93 A1.4 1446.46,331.5 D6.1
  Top Layer w40: A1.2 1302.36,300.79 A1.4
12V: A1.3 C30.2 C31.2 C32.+ D7.1 LM2.2 R12.2 | length 1257.1
  Top Layer w20: R12.2 841.83,860.92 841.83,930.81 C30.2 843.7,929.53 902.76,929.53 ; D7.1 902.33,929.1 902.76,929.53 ; C32.+ 1109.45,209.24 ; A1.3@1184.44,209.24 1109.45,209.24 ; 902.76,929.53 1026.38,929.53 1109.45,846.46 1109.45,209.24
"ESC Rx": F4.55 P5.2 | length 928.8
  Bottom Layer w10: P5.2 153.94,1143.7 206.3,1196.06 F4.55
"ESC Tx": F4.56 P5.1 | length 909.7
  Bottom Layer w10: P5.1 141.34,1215.36 1010.93,1215.36 1010.97,1215.4 1040.9,1215.4 F4.56@1040.94,1215.36
"ESP82 RX": ESP82.8 F4.80 | length 958.1
  Top Layer w10: v1(898.82,1761.42) 899.41,1762.01 1123.03,1762.01 v1(1123.62,1762.6)
  Bottom Layer w10: ESP82.8 452.36,1703.15 695.48,1703.15 753.75,1761.42 v1(898.82,1761.42) ; v1(1123.62,1762.6) 1124.02,1762.6 1181.1,1705.51 F4.80
"ESP82 TX": ESP82.4 F4.83 | length 713.3
  Top Layer w10: v1(862.99,1800.79) 1151.58,1800.79 v1(1176.38,1775.99)
  Bottom Layer w10: ESP82.4 771.26,1892.52 v1(862.99,1800.79) ; v1(1176.38,1775.99) 1240.16,1712.21 F4.83
"F407 NRST": C14.1 F4.14 P1.4 R2.2 S1.1 S1.2 | length 2081.4
  Top Layer w10: v1(873.62,1737.4) 875.18,1737.4 878.72,1733.86 1231.89,1733.86 ; P1.4 1231.89,1733.86 ; v1(1393.7,1572.05) 1231.89,1733.86
  Top Layer w20: C14.1 220.67,1578.15 327.36,1578.15 S1.2 332.28,1583.07 v1(505.91,1583.07) 681.89,1583.07 S1.1
  Bottom Layer w10: v1(505.91,1583.07) 719.29,1583.07 v1(873.62,1737.4) ; P1.4 1232.58,1851.87 1232.58,1920.97 R2.2 ; v1(1393.7,1572.05) 1393.7,1466.54 1526.03,1334.21 1635.48,1334.21 F4.14
"F407 OSC IN": C15.2 F4.12 Y1.2 | length 468.7
  Top Layer w10: Y1.2 1864.57,1611.54 v1(1864.57,1428.35)
  Bottom Layer w10: F4.12 1808.66,1373.23 1829.92,1394.49 C15.2 1863.88,1395.18 1863.88,1427.66 v1(1864.57,1428.35)
"F407 OSC OUT": C16.1 F4.13 Y1.1 | length 444
  Top Layer w10: Y1.1 1864.17,1129.2 v1(1864.17,1294.88)
  Bottom Layer w10: F4.13 1816.93,1353.54 1836.22,1334.25 C16.1 1863.68,1333.76 1863.68,1295.37 v1(1864.17,1294.88)
"F407 SWCLK": F4.76 P1.3 | length 213.3
  Bottom Layer w10: F4.76 1102.36,1811.57 1133.46,1842.67 P1.3
"F407 SWDIO": F4.72 P1.2 | length 476.4
  Bottom Layer w10: P1.2 1035.04,1844.88 923.62,1733.47 923.62,1543.31 935.83,1531.1 1010.14,1531.1 1010.18,1531.06 1040.9,1531.06 F4.72@1040.94,1531.1
GND: A1.1 A2.1 C1.1 C2.1 C3.1 C4.1 C5.1 C6.1 C7.2 C8.2 C9.1 C10.1 C11.1 C12.1 C13.1 C14.2 C15.1 C16.2 C18.2 C19.2 C20.2 C21.2 C22.2 C25.2 C26.1 C27.- C28.2 C29.2 C31.1 C32.- C34.2 CMPS12.1 D8.1 ESP82.5 F4.10 F4.20 F4.27 F4.74 F4.99 GY25.1 GY87.6 I2C.4 MP1.8 P1.5 P5.8 R3.2 R5.2 R6.2 R7.2 R8.2 R9.2 R10.2 R11.2 R14.1 RC.17 RC.18 RC.19 RC.20 RC.21 RC.22 RC.23 RC.24 S1.3 S1.4 Uart.4 VL53.4 | length 866.3
  Top Layer w10: C12.1 1112.99,1546.46 v1(1112.99,1511.42) ; C4.1 1534.06,1589.57 1532.68,1590.95 1532.68,1699.61 v1(1553.15,1720.08) ; C6.1 1554.92,1431.3 1572.13,1414.09 1582.37,1414.09 v1(1583.47,1412.99) ; v1(1555.51,1000) 1555.51,998.44 1565.43,988.52 1565.43,969.21 C11.1
  Top Layer w20: C12.1 1110.73,1548.92 1170.37,1548.92 C13.1 ; C5.1 1489.96,1431.1 1549.8,1431.1 C6.1 ; C8.2 C7.2 ; C9.1 C10.1 C11.1
  Bottom Layer w10: F4.74 1041.69,1569.73 1090.9,1569.73 1111.89,1548.74 1111.89,1512.52 v1(1112.99,1511.42) ; v1(1553.15,1720.08) 1553.15,1718.52 1555.12,1716.56 F4.99 ; F4.27 1555.31,1056.1 1555.31,1000.2 v1(1555.51,1000) ; v1(1583.47,1412.99) 1583.66,1412.8 1635.63,1412.8 F4.10
  other v2: 139.19,139.19
"GY25 Rx": F4.68 GY25.3 | length 204.3
  Bottom Layer w10: GY25.3 879.33,1523.23 950.59,1451.97 F4.68
"GY25 Tx": F4.69 GY25.2 | length 195.5
  Top Layer w10: GY25.2 930.71,1423.23 v1(979.92,1472.44)
  Bottom Layer w10: v1(979.92,1472.44) 980.36,1472 1040.99,1472 F4.69
"GY87 SCL": F4.47 GY87.5 | length 1022.2
  Bottom Layer w10: F4.47 1161.42,994.88 1262.6,893.7 GY87.5
"GY87 SDA": F4.48 GY87.4 | length 1235.7
  Bottom Layer w10: F4.48 1141.73,991.94 1212.6,921.07 1212.6,41.34 1236.22,17.72 1317.13,17.72 1362.6,63.19 GY87.4
I2C_SCL: F4.92 I2C.3 | length 318.8
  Bottom Layer w10: F4.92 1417.32,1747.24 1451.18,1781.1 1536.61,1781.1 1568.11,1812.6 I2C.3
I2C_SDA: F4.93 I2C.2 | length 327.2
  Bottom Layer w10: F4.93 1437.01,1726.38 1460.63,1750 1551.97,1750 1599.61,1797.64 I2C.2
LED1: D1.1 F4.64 | length 191.1
  Top Layer w10: v1(1157.09,1430.32) 1157.09,1391.7 D1.1
  Bottom Layer w10: F4.64 1101.56,1373.23 1157.09,1428.76 v1(1157.09,1430.32)
LED2: D2.1 F4.63 | length 206.9
  Top Layer w10: v1(1125.2,1282.28) 1153.15,1282.28 1162.73,1291.86 1162.73,1315.52 D2.1
  Bottom Layer w10: F4.63 1041.69,1353.2 1096.41,1353.2 1124.8,1324.8 v1@1124.8,1282.68
LED3: D3.1 F4.57 | length 180.2
  Top Layer w10: D3.1 1169.29,1226.02 v1(1169.29,1264.49)
  Bottom Layer w10: F4.57 1139.76,1235.43 1168.82,1264.49 v1(1169.29,1264.49)
LED4: D4.1 F4.46 | length 112.8
  Top Layer w10: v1@1167.32,1125.98 1167.32,1160.7 D4.1
  Bottom Layer w10: v1(1167.72,1125.59) 1167.72,1124.04 1181.1,1110.65 F4.46
"MP9486 FB": MP1.1 R12.1 R13.2 R14.2 | length 285.4
  Top Layer w20: R13.2 623.23,928.74 623.23,859.84 ; MP1.1 623.23,859.84 ; R14.2@726.18,859.84 623.23,859.84 ; R14.2 726.87,860.53 784.35,860.53 R12.1
NetC1_2: C1.2 C2.2 LM1.1 R1.1 | length 222.5
  Top Layer w20: LM1.1 1542.91,1274.02 1618.5,1274.02 C1.2 1619.78,1273.72 1678.64,1273.72 C2.2 1713.98,1274.21 1727.92,1260.27 1727.92,1235.08 1729.73,1233.27 R1.1
NetC18_1: C18.1 F4.73 | length 83.8
  Bottom Layer w10: C18.1 966.34,1550.79 1010.93,1550.79 1010.97,1550.74 1040.9,1550.74 F4.73@1040.95,1550.79
NetC19_1: C19.1 F4.49 | length 90.2
  Bottom Layer w10: C19.1 1122.05,967.52 F4.49
NetC30_1: C30.1 R13.1 | length 106.6
  Top Layer w20: R13.1 679.13,930.71 784.65,930.71 C30.1
NetC33_1: C33.1 D8.2 LM2.1 MP1.5
NetC33_2: C33.2 MP1.4 | length 324.6
  Top Layer w20: C33.2 341.93,599.8 v1(342.13,599.61) ; v1(434.25,806.69) 472.83,806.69 MP1.4
  Bottom Layer w20: v1(342.13,599.61) 434.65,692.13 434.65,806.3 v1(434.25,806.69)
NetD1_2: D1.2 R5.1 | length 59.4
  Top Layer w20: D1.2 1232.91,1382.87 1291.73,1382.87 R5.1
NetD2_2: D2.2 R6.1 | length 59.5
  Top Layer w20: D2.2 1233.11,1318.11 1291.54,1318.11 R6.1
NetD3_2: D3.2 R7.1 | length 56.8
  Top Layer w20: D3.2 1235.47,1224.41 1291.14,1224.41 R7.1
NetD4_2: D4.2 R8.1 | length 57.8
  Top Layer w20: D4.2 1237.21,1163.58 1293.31,1163.58 R8.1
NetD5_2: D5.2 R9.1 | length 64.2
  Top Layer w20: D5.2 D5.2 1582.02,658.33 R9.1
NetD6_2: D6.2 R10.1 | length 66.9
  Top Layer w20: R10.1 1580.33,265.37 1580.33,331.09 D6.2
NetD7_2: D7.2 R11.1 | length 65.9
  Top Layer w20: D7.2 976.81,851.58 R11.1@1032.09,851.58
NetF4_22: F4.22 R1.2 | length 97
  Top Layer w10: v1(1690.16,1175.2) 1690.65,1175.69 1731.4,1175.69 R1.2
  Bottom Layer w10: F4.22 1636.17,1176.03 1689.32,1176.03 v1(1690.16,1175.2)
NetF4_94: F4.94 R3.1 | length 206.7
  Top Layer w10: v1@1456.69,1703.94 1456.69,1582.87 R3.1
  Bottom Layer w10: v1(1456.3,1704.33) 1456.5,1704.14 1456.5,1650.99 F4.94 ; F4.94@1457.09,1651.18 1457.04,1651.23 1457.04,1681.94 F4.94@1457.09,1681.99
NetMP1_6: MP1.6 MP1.7 | length 50
  Top Layer w20: MP1.6 MP1.7
"PWM MOTOR 1": F4.62 P5.3 | length 1101.6
  Top Layer w10: v1(923.23,1176.38) 923.23,1315.36 943.78,1335.91 971.18,1335.91 v1(971.65,1335.43)
  Bottom Layer w10: P5.3 194.1,1064.96 305.51,1176.38 v1(923.23,1176.38) ; v1(971.65,1335.43) 973.21,1335.43 974.78,1333.86 F4.62
"PWM MOTOR 2": F4.61 P5.4 | length 1158
  Top Layer w10: v1(950.79,1141.34) 951.18,1141.73 951.18,1314.96 v1(951.58,1315.36)
  Bottom Layer w6: P5.4 129.13,986.22 127.95,987.4 P5.4@134.25,987.4
  Bottom Layer w10: P5.4@134.25,987.4 796.85,987.4 v1(950.79,1141.34) ; v1(951.58,1315.36) 952.41,1314.52 1040.99,1314.52 F4.61
"PWM MOTOR 3": F4.60 P5.5 | length 1174.2
  Top Layer w10: v1(967.72,1101.97) 979.13,1113.39 979.13,1292.78 980.32,1293.96 v1(980.32,1295.52)
  Bottom Layer w10: P5.5 773.23,907.48 v1(967.72,1101.97) ; v1(980.32,1295.52) 981,1294.84 1040.99,1294.84 F4.60
"PWM MOTOR 4": F4.59 P5.6 | length 1265.8
  Top Layer w10: v1(997.24,1081.1) 1102.36,1186.22 v1(1102.36,1274.8)
  Bottom Layer w10: P5.6 744.88,828.74 v1(997.24,1081.1) ; F4.59 v1(1102.36,1274.8)
"RC PWM INPUT 1": F4.30 RC.1 | length 292.6
  Bottom Layer w10: F4.30 1496.06,1005.91 1532.68,969.29 1656.3,969.29 RC.1
"RC PWM INPUT 2": F4.31 RC.2 | length 322.1
  Bottom Layer w10: F4.31 1476.38,993.12 1552.96,916.54 RC.2
"RC PWM INPUT 3": F4.32 RC.3 | length 398.7
  Bottom Layer w10: F4.32 1456.69,968.9 1610.63,814.96 1701.97,814.96 RC.3
"RC PWM INPUT 4": F4.35 RC.4 | length 521.1
  Bottom Layer w10: F4.35 1397.64,931.5 1614.17,714.96 1701.97,714.96 RC.4
"RC PWM INPUT 5": F4.36 RC.5 | length 610.1
  Bottom Layer w10: F4.36 1377.95,882.68 1644.88,615.75 1702.76,615.75 RC.5
VBAT+: C28.1 C29.1 MP1.3 P5.7
pads on no net: CMPS12.2 CMPS12.3 CMPS12.4 CMPS12.5 ESP82.2 ESP82.3 ESP82.6 ESP82.7 F4.1 F4.2 F4.3 F4.4 F4.5 F4.6 F4.7 F4.8 F4.9 F4.15 F4.16 F4.17 F4.18 F4.23 F4.24 F4.25 F4.26 F4.29 F4.33 F4.34 F4.37 F4.38 F4.39 F4.40 F4.41 F4.42 F4.43 F4.44 F4.45 F4.51 F4.52 F4.53 F4.54 F4.58 F4.65 F4.66 F4.67 F4.70 F4.71 F4.77 F4.78 F4.79 F4.81 F4.82 F4.84 F4.85 F4.86 F4.87 F4.88 F4.89 F4.90 F4.91 F4.95 F4.96 F4.97 F4.98 GY87.1 GY87.2 GY87.3 I2C.M MP1.2 RC.6 RC.7 RC.8 RC.10 RC.11 RC.12 RC.13 RC.14 RC.15 RC.16 Uart.2 Uart.3 Uart.M VL53.2 VL53.3 VL53.M
copper on no net:
  other v2: 1829.31,139.19 139.19,1829.31 1829.31,1829.31

## Polygon pours and split planes (outlines as drawn)
GND on Top Layer "NONET_L01_P005" (solid, remove dead copper, shelved, pour order 5): 1968.51,1968.51 0,1968.51 0,0 1968.51,0
12V on Top Layer "12V_L01_P003" (solid, pour order 3): 656.3,18.5 650.79,24.02 650.79,402.76 656.26,408.23 791.38,408.23 797.64,401.97 797.64,278.74 831.1,245.28 906.3,245.28 920.08,232.68 1027.17,232.68 1027.17,185.83 964.96,185.83 797.64,18.5
GND on Top Layer "GND_L01_P002" (solid, remove dead copper, pour order 2): 1041.73,818.11 1072.05,788.19 1072.05,292.52 1052.76,273.23 835.83,273.23 819.29,289.76 819.29,425.59 548.82,425.59 543.31,431.1 543.31,537.01 541.73,538.58 546.06,542.91 597.64,542.91 597.64,635.04 598.03,635.43 271.26,635.43 239.76,603.94 239.76,31.89 207.87,0 1.97,0 1.97,702.76 -1.99,706.72 64.57,706.3 238.19,706.3 260.63,728.74 260.63,804.33 273.23,816.93 419.29,816.93 419.29,751.97 627.56,751.97 693.7,818.11
VBAT+ on Top Layer "VBAT+_L01_P001" (solid, pour order 1): 189.76,867.32 254.72,932.28 515.75,932.28 541.73,906.3 541.73,776.77 540.55,777.95 509.06,777.95 509.06,838.19 503.54,843.7 285.04,843.7 238.19,796.85 238.19,727.95 230.32,720.08 101.97,720.08 84.65,737.4 84.65,762.2 102.36,779.92 168.5,779.92 189.76,801.18
NetC33_1 on Top Layer "NETC33_1_L01_P000" (solid, pour order 0): 289.37,501.57 283.07,495.28 251.18,495.28 251.18,38.98 260.24,29.92 364.96,29.92 366.34,31.3 377.95,19.68 580.71,19.68 580.71,386.61 522.05,445.28 522.05,519.69 490.16,551.57 490.16,625.59 410.9,625.59 354.72,549.17 354.72,522.22 327.78,495.28 321.06,495.28 314.57,501.77 314.57,542.72 289.37,542.72
GND on Bottom Layer "NONET_L02_P006" (solid, remove dead copper, shelved, pour order 6): 1968.51,1968.51 0,1968.51 0,0 1968.51,0
GND on Bottom Layer "GND_L02_P004" (solid, remove dead copper, pour order 4): 937.01,229.53 906.3,198.82 905.91,198.82 905.91,0.79 905.12,0 0,0 0,710.63 44.09,754.72 1039.66,754.72 1073.62,720.36 1072.32,229.53

## Keep-outs
Keep-Out Layer:
  circle w29.53: c1829.31,1829.31 r85.78
  circle w29.53: c139.19,1829.31 r85.78
  lines w10: 0,0 1968.5,0 1968.5,1968.5 0,1968.5 0,0

## Silkscreen, mask and mechanical layers (free items; w line width, h text height)
Top Overlay:
  circle w20: c139.19,139.19 r91.04
  circle w20: c1829.31,1829.31 r91.04
  circle w20: c139.19,1829.31 r91.04
  circle w20: c1829.31,139.19 r91.04
  lines w10: 204.33,221.65 932.68,221.65 932.68,1166.54 204.33,1166.54 204.33,221.65
Bottom Overlay:
  drawing of 18 lines, arcs and shapes, not listed